# Altium PCB Signal_Integrity_2L.PcbDoc (part 2 of 2)
Units mm, origin at the board's own origin, x right, y up, seen from the top; angles counter-clockwise.
Board outline 110 x 260 mm, 2 copper layers (Top Layer 1, Bottom Layer 1), stack 1.6 mm thick; 48 components, 38 nets, 216 pads, 2708 vias.
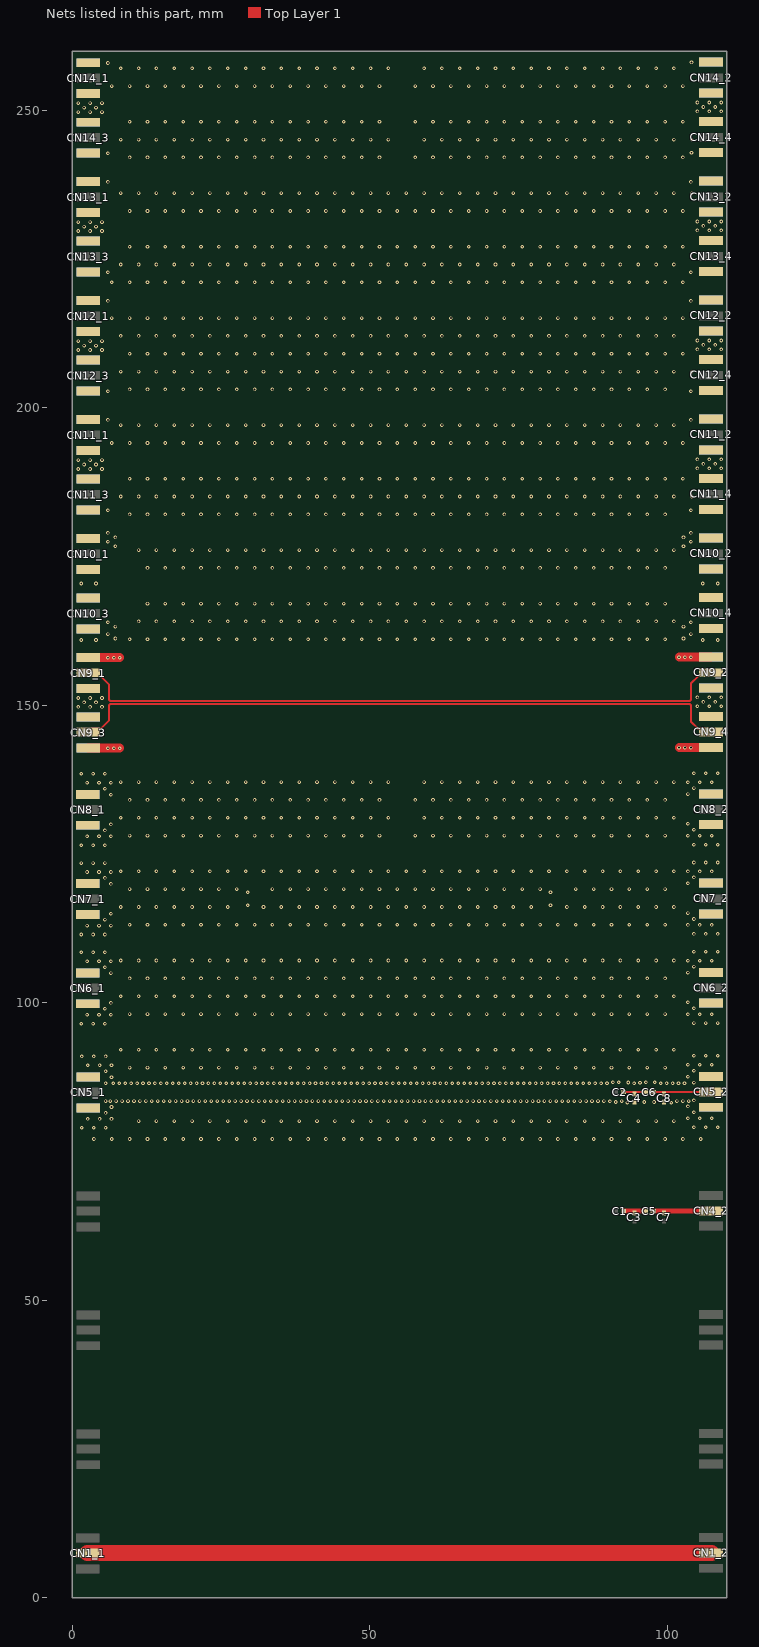
[diagram p2: the nets of this part, all layers, seen from the top]

## Via types
v1: diameter 0.6, hole 0.3, Top Layer 1 to Bottom Layer 1, tented both sides, 2700 vias
v2: diameter 0.7, hole 0.3, Top Layer 1 to Bottom Layer 1, tented both sides, 8 vias

## Nets (pads, with @x,y where several pads share a name; then routed paths per layer and width w, separated by ;. In a path a pad name is that pad's centre, name@x,y a point inside that pad or via, vN(x,y) a via of type N, cw(c..) or ccw(c..) an arc to the next point about the centre after c; other vN are vias at no path point) (continued)
GND5: C4.1 C8.1 CN5_1.2 CN5_2.2
  other v1: 3.65,77.121 6.65,77.121 9.65,77.121 12.65,77.121 15.65,77.121 18.65,77.121 21.65,77.121 24.65,77.121 27.65,77.121 30.65,77.121 33.65,77.121 36.65,77.121 39.65,77.121 42.65,77.121 45.65,77.121 48.65,77.121 51.65,77.121 54.65,77.121 57.65,77.121 60.65,77.121 63.65,77.121 66.65,77.121 69.65,77.121 72.65,77.121 75.65,77.121 78.65,77.121 81.65,77.121 84.65,77.121 87.65,77.121 90.65,77.121 93.65,77.121 96.65,77.121 99.65,77.121 102.65,77.121 105.65,77.121 1.6,79 3.6,79 5.6,79 104.5,79.1 106.5,79.1 108.5,79.1 11.15,80.121 14.15,80.121 17.15,80.121 20.15,80.121 23.15,80.121 26.15,80.121 29.15,80.121 32.15,80.121 35.15,80.121 38.15,80.121 41.15,80.121 44.15,80.121 47.15,80.121 50.15,80.121 53.15,80.121 56.15,80.121 59.15,80.121 62.15,80.121 65.15,80.121 68.15,80.121 71.15,80.121 74.15,80.121 77.15,80.121 80.15,80.121 83.15,80.121 86.15,80.121 89.15,80.121 92.15,80.121 95.15,80.121 98.15,80.121 101.15,80.121 2.6,80.5 4.6,80.5 6.6,80.5 103.5,80.6 105.5,80.6 107.5,80.6 5.6,81.5 104.5,81.6 6.6,82.5 103.5,82.6 100.686,83.226 93.289,83.245 91.37,83.339 96.16,83.339 97.804,83.339 90.376,83.45 92.359,83.484 5.6,83.5 6.377,83.495 7.377,83.495 8.377,83.495 9.377,83.495 10.377,83.495 11.377,83.495 12.377,83.495 13.377,83.495 14.377,83.495 15.377,83.495 16.377,83.495 17.377,83.495 18.377,83.495 19.377,83.495 20.377,83.495 21.377,83.495 22.377,83.495 23.377,83.495 24.377,83.495 25.377,83.495 26.377,83.495 27.377,83.495 28.377,83.495 29.377,83.495 30.377,83.495 31.377,83.495 32.377,83.495 33.377,83.495 34.377,83.495 35.377,83.495 36.377,83.495 37.377,83.495 38.377,83.495 39.377,83.495 40.377,83.495 41.377,83.495 42.377,83.495 43.377,83.495 44.377,83.495 45.377,83.495 46.377,83.495 47.377,83.495 48.377,83.495 49.377,83.495 50.377,83.495 51.377,83.495 52.377,83.495 53.377,83.495 54.377,83.495 55.377,83.495 56.377,83.495 57.377,83.495 58.377,83.495 59.377,83.495 60.377,83.495 61.377,83.495 62.377,83.495 63.377,83.495 64.377,83.495 65.377,83.495 66.377,83.495 67.377,83.495 68.377,83.495 69.377,83.495 70.377,83.495 71.377,83.495 72.377,83.495 73.377,83.495 74.377,83.495 75.377,83.495 76.377,83.495 77.377,83.495 78.377,83.495 79.377,83.495 80.377,83.495 81.377,83.495 82.377,83.495 83.377,83.495 84.377,83.495 85.377,83.495 86.377,83.495 87.377,83.495 88.377,83.495 89.377,83.495 101.649,83.495 102.649,83.495 103.649,83.495 104.5,83.6 5.6,86.5 6.899,86.505 7.899,86.505 8.899,86.505 9.899,86.505 10.899,86.505 11.899,86.505 12.899,86.505 13.899,86.505 14.899,86.505 15.899,86.505 16.899,86.505 17.899,86.505 18.899,86.505 19.899,86.505 20.899,86.505 21.899,86.505 22.899,86.505 23.899,86.505 24.899,86.505 25.899,86.505 26.899,86.505 27.899,86.505 28.899,86.505 29.899,86.505 30.899,86.505 31.899,86.505 32.899,86.505 33.899,86.505 34.899,86.505 35.899,86.505 36.899,86.505 37.899,86.505 38.899,86.505 39.899,86.505 40.899,86.505 41.899,86.505 42.899,86.505 43.899,86.505 44.899,86.505 45.899,86.505 46.899,86.505 47.899,86.505 48.899,86.505 49.898,86.505 50.898,86.505 51.898,86.505 52.898,86.505 53.898,86.505 54.898,86.505 55.898,86.505 56.898,86.505 57.898,86.505 58.898,86.505 59.898,86.505 60.898,86.505 61.898,86.505 62.898,86.505 63.898,86.505 64.898,86.505 65.898,86.505 66.898,86.505 67.898,86.505 68.898,86.505 69.898,86.505 70.898,86.505 71.898,86.505 72.898,86.505 73.898,86.505 74.898,86.505 75.898,86.505 76.898,86.505 77.898,86.505 78.898,86.505 79.898,86.505 80.898,86.505 81.898,86.505 82.898,86.505 83.898,86.505 84.898,86.505 85.898,86.505 86.898,86.505 87.898,86.505 88.898,86.505 89.898,86.505 94.447,86.505 98.918,86.505 99.918,86.505 100.918,86.505 101.918,86.505 102.918,86.505 95.445,86.578 104.5,86.6 93.454,86.618 90.886,86.661 91.886,86.647 96.441,86.661 97.93,86.661 6.6,87.5 103.5,87.6 5.6,88.5 104.5,88.6 9.65,89.121 12.65,89.121 15.65,89.121 18.65,89.121 21.65,89.121 24.65,89.121 27.65,89.121 30.65,89.121 33.65,89.121 36.65,89.121 39.65,89.121 42.65,89.121 45.65,89.121 48.65,89.121 51.65,89.121 54.65,89.121 57.65,89.121 60.65,89.121 63.65,89.121 66.65,89.121 69.65,89.121 72.65,89.121 75.65,89.121 78.65,89.121 81.65,89.121 84.65,89.121 87.65,89.121 90.65,89.121 93.65,89.121 96.65,89.121 99.65,89.121 2.6,89.5 4.6,89.5 6.6,89.5 103.5,89.6 105.5,89.6 107.5,89.6 1.6,91 3.6,91 5.6,91 104.5,91.1 106.5,91.1 108.5,91.1 8.15,92.121 11.15,92.121 14.15,92.121 17.15,92.121 20.15,92.121 23.15,92.121 26.15,92.121 29.15,92.121 32.15,92.121 35.15,92.121 38.15,92.121 41.15,92.121 44.15,92.121 47.15,92.121 50.15,92.121 53.15,92.121 56.15,92.121 59.15,92.121 62.15,92.121 65.15,92.121 68.15,92.121 71.15,92.121 74.15,92.121 77.15,92.121 80.15,92.121 83.15,92.121 86.15,92.121 89.15,92.121 92.15,92.121 95.15,92.121 98.15,92.121 101.15,92.121
GND6: CN6_1.2 CN6_2.2
  other v1: 1.5,96.5 3.5,96.5 5.5,96.5 104.5,96.6 106.5,96.6 108.5,96.6 2.5,98 4.5,98 6.5,98 9.65,98.121 12.65,98.121 15.65,98.121 18.65,98.121 21.65,98.121 24.65,98.121 27.65,98.121 30.65,98.121 33.65,98.121 36.65,98.121 39.65,98.121 42.65,98.121 45.65,98.121 48.65,98.121 51.65,98.121 54.65,98.121 57.65,98.121 60.65,98.121 63.65,98.121 66.65,98.121 69.65,98.121 72.65,98.121 75.65,98.121 78.65,98.121 81.65,98.121 84.65,98.121 87.65,98.121 90.65,98.121 93.65,98.121 96.65,98.121 99.65,98.121 103.5,98.1 105.5,98.1 107.5,98.1 5.5,99 104.5,99.1 6.5,100 103.5,100.1 8.15,101.121 11.15,101.121 14.15,101.121 17.15,101.121 20.15,101.121 23.15,101.121 26.15,101.121 29.15,101.121 32.15,101.121 35.15,101.121 38.15,101.121 41.15,101.121 44.15,101.121 47.15,101.121 50.15,101.121 53.15,101.121 56.15,101.121 59.15,101.121 62.15,101.121 65.15,101.121 68.15,101.121 71.15,101.121 74.15,101.121 77.15,101.121 80.15,101.121 83.15,101.121 86.15,101.121 89.15,101.121 92.15,101.121 95.15,101.121 98.15,101.121 101.15,101.121 9.65,104.121 12.65,104.121 15.65,104.121 18.65,104.121 21.65,104.121 24.65,104.121 27.65,104.121 30.65,104.121 33.65,104.121 36.65,104.121 39.65,104.121 42.65,104.121 45.65,104.121 48.65,104.121 51.65,104.121 54.65,104.121 57.65,104.121 60.65,104.121 63.65,104.121 66.65,104.121 69.65,104.121 72.65,104.121 75.65,104.121 78.65,104.121 81.65,104.121 84.65,104.121 87.65,104.121 90.65,104.121 93.65,104.121 96.65,104.121 99.65,104.121 6.5,105 103.5,105.1 5.5,106 104.5,106.1 2.5,107 4.5,107 6.5,107 103.5,107.1 105.5,107.1 107.5,107.1 8.15,107.121 11.15,107.121 14.15,107.121 17.15,107.121 20.15,107.121 23.15,107.121 26.15,107.121 29.15,107.121 32.15,107.121 35.15,107.121 38.15,107.121 41.15,107.121 44.15,107.121 47.15,107.121 50.15,107.121 53.15,107.121 56.15,107.121 59.15,107.121 62.15,107.121 65.15,107.121 68.15,107.121 71.15,107.121 74.15,107.121 77.15,107.121 80.15,107.121 83.15,107.121 86.15,107.121 89.15,107.121 92.15,107.121 95.15,107.121 98.15,107.121 101.15,107.121 1.5,108.5 3.5,108.5 5.5,108.5 104.5,108.6 106.5,108.6 108.5,108.6
GND7: CN7_1.2 CN7_2.2
  other v1: 1.5,111.5 3.5,111.5 5.5,111.5 104.5,111.6 106.5,111.6 108.5,111.6 2.5,113 4.5,113 6.5,113 103.5,113.1 105.5,113.1 107.5,113.1 9.65,113.121 12.65,113.121 15.65,113.121 18.65,113.121 21.65,113.121 24.65,113.121 27.65,113.121 30.65,113.121 33.65,113.121 36.65,113.121 39.65,113.121 42.65,113.121 45.65,113.121 48.65,113.121 51.65,113.121 54.65,113.121 57.65,113.121 60.65,113.121 63.65,113.121 66.65,113.121 69.65,113.121 72.65,113.121 75.65,113.121 78.65,113.121 81.65,113.121 84.65,113.121 87.65,113.121 90.65,113.121 93.65,113.121 96.65,113.121 99.65,113.121 5.5,114 104.5,114.1 6.5,115 103.5,115.1 8.15,116.121 11.15,116.121 14.15,116.121 17.15,116.121 20.15,116.121 23.15,116.121 26.15,116.121 32.15,116.121 35.15,116.121 38.15,116.121 41.15,116.121 44.15,116.121 47.15,116.121 50.15,116.121 53.15,116.121 56.15,116.121 59.15,116.121 62.15,116.121 65.15,116.121 68.15,116.121 71.15,116.121 74.15,116.121 77.15,116.121 83.15,116.121 86.15,116.121 89.15,116.121 92.15,116.121 95.15,116.121 98.15,116.121 101.15,116.121 29.5,116.4 80.4,116.4 29.5,118.6 80.4,118.6 9.65,119.121 12.65,119.121 15.65,119.121 18.65,119.121 21.65,119.121 24.65,119.121 27.65,119.121 33.65,119.121 36.65,119.121 39.65,119.121 42.65,119.121 45.65,119.121 48.65,119.121 51.65,119.121 54.65,119.121 57.65,119.121 60.65,119.121 63.65,119.121 66.65,119.121 69.65,119.121 72.65,119.121 75.65,119.121 78.65,119.121 84.65,119.121 87.65,119.121 90.65,119.121 93.65,119.121 96.65,119.121 99.65,119.121 6.5,120 103.5,120.1 5.5,121 104.5,121.1 2.5,122 4.5,122 6.5,122 103.5,122.1 105.5,122.1 107.5,122.1 8.15,122.121 11.15,122.121 14.15,122.121 17.15,122.121 20.15,122.121 23.15,122.121 26.15,122.121 29.15,122.121 32.15,122.121 35.15,122.121 38.15,122.121 41.15,122.121 44.15,122.121 47.15,122.121 50.15,122.121 53.15,122.121 56.15,122.121 59.15,122.121 62.15,122.121 65.15,122.121 68.15,122.121 71.15,122.121 74.15,122.121 77.15,122.121 80.15,122.121 83.15,122.121 86.15,122.121 89.15,122.121 92.15,122.121 95.15,122.121 98.15,122.121 101.15,122.121 1.5,123.5 3.5,123.5 5.5,123.5 104.5,123.6 106.5,123.6 108.5,123.6
GND8: CN8_1.2 CN8_2.2
  other v1: 1.5,126.5 3.5,126.5 5.5,126.5 104.5,126.6 106.5,126.6 108.5,126.6 2.5,128 4.5,128 6.5,128 103.5,128.1 105.5,128.1 107.5,128.1 9.65,128.121 12.65,128.121 15.65,128.121 18.65,128.121 21.65,128.121 24.65,128.121 27.65,128.121 30.65,128.121 33.65,128.121 36.65,128.121 39.65,128.121 42.65,128.121 45.65,128.121 48.65,128.121 51.65,128.121 57.65,128.121 60.65,128.121 63.65,128.121 66.65,128.121 69.65,128.121 72.65,128.121 75.65,128.121 78.65,128.121 81.65,128.121 84.65,128.121 87.65,128.121 90.65,128.121 93.65,128.121 96.65,128.121 99.65,128.121 5.5,129 104.5,129.1 6.5,130 103.5,130.1 8.15,131.121 11.15,131.121 14.15,131.121 17.15,131.121 20.15,131.121 23.15,131.121 26.15,131.121 29.15,131.121 32.15,131.121 35.15,131.121 38.15,131.121 41.15,131.121 44.15,131.121 47.15,131.121 50.15,131.121 53.15,131.121 59.15,131.121 62.15,131.121 65.15,131.121 68.15,131.121 71.15,131.121 74.15,131.121 77.15,131.121 80.15,131.121 83.15,131.121 86.15,131.121 89.15,131.121 92.15,131.121 95.15,131.121 98.15,131.121 101.15,131.121 9.65,134.121 12.65,134.121 15.65,134.121 18.65,134.121 21.65,134.121 24.65,134.121 27.65,134.121 30.65,134.121 33.65,134.121 36.65,134.121 39.65,134.121 42.65,134.121 45.65,134.121 48.65,134.121 51.65,134.121 57.65,134.121 60.65,134.121 63.65,134.121 66.65,134.121 69.65,134.121 72.65,134.121 75.65,134.121 78.65,134.121 81.65,134.121 84.65,134.121 87.65,134.121 90.65,134.121 93.65,134.121 96.65,134.121 99.65,134.121 6.5,135 103.5,135.1 5.5,136 104.5,136.1 2.5,137 4.5,137 6.5,137 103.5,137.1 105.5,137.1 107.5,137.1 8.15,137.121 11.15,137.121 14.15,137.121 17.15,137.121 20.15,137.121 23.15,137.121 26.15,137.121 29.15,137.121 32.15,137.121 35.15,137.121 38.15,137.121 41.15,137.121 44.15,137.121 47.15,137.121 50.15,137.121 53.15,137.121 59.15,137.121 62.15,137.121 65.15,137.121 68.15,137.121 71.15,137.121 74.15,137.121 77.15,137.121 80.15,137.121 83.15,137.121 86.15,137.121 89.15,137.121 92.15,137.121 95.15,137.121 98.15,137.121 101.15,137.121 1.5,138.5 3.5,138.5 5.5,138.5 104.5,138.6 106.5,138.6 108.5,138.6
GND9: CN9_1.2 CN9_2.2 CN9_3.2 CN9_4.2 | length 21
  Top Layer 1 w1.5: CN9_3.2@2.7,142.86 v1@7.96,142.86 ; CN9_1.2@2.7,158.04 v1@7.96,158.04 ; v1@102.04,142.96 CN9_4.2@107.3,142.96 ; v1@102.04,158.14 CN9_2.2@107.3,158.14
  other v1: 6,142.82 7,142.82 8,142.82 102,142.92 103,142.92 104,142.92 1,149.75 3,149.75 5,149.75 105.1,149.85 107.1,149.85 109.1,149.85 2,150.5 4,150.5 106.1,150.6 108.1,150.6 1,151.25 3,151.25 5,151.25 105.1,151.35 107.1,151.35 109.1,151.35 6,158 7,158 8,158 102,158.1 103,158.1 104,158.1
GND10: CN10_1.2 CN10_2.2 CN10_3.2 CN10_4.2
  other v1: 1.5,161 4,161 106,161 108.5,161 9.65,161.121 12.65,161.121 15.65,161.121 18.65,161.121 21.65,161.121 24.65,161.121 27.65,161.121 30.65,161.121 33.65,161.121 36.65,161.121 39.65,161.121 42.65,161.121 45.65,161.121 48.65,161.121 51.65,161.121 54.65,161.121 57.65,161.121 60.65,161.121 63.65,161.121 66.65,161.121 69.65,161.121 72.65,161.121 75.65,161.121 78.65,161.121 81.65,161.121 84.65,161.121 87.65,161.121 90.65,161.121 93.65,161.121 96.65,161.121 99.65,161.121 7.25,161.25 102.75,161.25 6,162 104,162 7.25,163.25 102.75,163.25 6,164 104,164 11.15,164.121 14.15,164.121 17.15,164.121 20.15,164.121 23.15,164.121 26.15,164.121 29.15,164.121 32.15,164.121 35.15,164.121 38.15,164.121 41.15,164.121 44.15,164.121 47.15,164.121 50.15,164.121 53.15,164.121 56.15,164.121 59.15,164.121 62.15,164.121 65.15,164.121 68.15,164.121 71.15,164.121 74.15,164.121 77.15,164.121 80.15,164.121 83.15,164.121 86.15,164.121 89.15,164.121 92.15,164.121 95.15,164.121 98.15,164.121 101.15,164.121 12.65,167.121 15.65,167.121 18.65,167.121 21.65,167.121 24.65,167.121 27.65,167.121 30.65,167.121 33.65,167.121 36.65,167.121 39.65,167.121 42.65,167.121 45.65,167.121 48.65,167.121 51.65,167.121 54.65,167.121 57.65,167.121 60.65,167.121 63.65,167.121 66.65,167.121 69.65,167.121 72.65,167.121 75.65,167.121 78.65,167.121 81.65,167.121 84.65,167.121 87.65,167.121 90.65,167.121 93.65,167.121 96.65,167.121 99.65,167.121 1.5,170.5 4,170.5 106,170.5 108.5,170.5 12.65,173.121 15.65,173.121 18.65,173.121 21.65,173.121 24.65,173.121 27.65,173.121 30.65,173.121 33.65,173.121 36.65,173.121 39.65,173.121 42.65,173.121 45.65,173.121 48.65,173.121 51.65,173.121 54.65,173.121 57.65,173.121 60.65,173.121 63.65,173.121 66.65,173.121 69.65,173.121 72.65,173.121 75.65,173.121 78.65,173.121 81.65,173.121 84.65,173.121 87.65,173.121 90.65,173.121 93.65,173.121 96.65,173.121 99.65,173.121 11.15,176.121 14.15,176.121 17.15,176.121 20.15,176.121 23.15,176.121 26.15,176.121 29.15,176.121 32.15,176.121 35.15,176.121 38.15,176.121 41.15,176.121 44.15,176.121 47.15,176.121 50.15,176.121 53.15,176.121 56.15,176.121 59.15,176.121 62.15,176.121 65.15,176.121 68.15,176.121 71.15,176.121 74.15,176.121 77.15,176.121 80.15,176.121 83.15,176.121 86.15,176.121 89.15,176.121 92.15,176.121 95.15,176.121 98.15,176.121 101.15,176.121 7.25,176.75 102.75,176.75 6,177.5 104,177.5 7.25,178.25 102.75,178.25 6,179 104,179
GND11: CN11_1.2 CN11_2.2 CN11_3.2 CN11_4.2
  other v1: 9.65,182.121 12.65,182.121 15.65,182.121 18.65,182.121 21.65,182.121 24.65,182.121 27.65,182.121 30.65,182.121 33.65,182.121 36.65,182.121 39.65,182.121 42.65,182.121 45.65,182.121 48.65,182.121 51.65,182.121 54.65,182.121 57.65,182.121 60.65,182.121 63.65,182.121 66.65,182.121 69.65,182.121 72.65,182.121 75.65,182.121 78.65,182.121 81.65,182.121 84.65,182.121 87.65,182.121 90.65,182.121 93.65,182.121 96.65,182.121 99.65,182.121 6,182.82 104,182.82 8.15,185.121 11.15,185.121 14.15,185.121 17.15,185.121 20.15,185.121 23.15,185.121 26.15,185.121 29.15,185.121 32.15,185.121 35.15,185.121 38.15,185.121 41.15,185.121 44.15,185.121 47.15,185.121 50.15,185.121 53.15,185.121 56.15,185.121 59.15,185.121 62.15,185.121 65.15,185.121 68.15,185.121 71.15,185.121 74.15,185.121 77.15,185.121 80.15,185.121 83.15,185.121 86.15,185.121 89.15,185.121 92.15,185.121 95.15,185.121 98.15,185.121 101.15,185.121 104.15,185.121 9.65,188.121 12.65,188.121 15.65,188.121 18.65,188.121 21.65,188.121 24.65,188.121 27.65,188.121 30.65,188.121 33.65,188.121 36.65,188.121 39.65,188.121 42.65,188.121 45.65,188.121 48.65,188.121 51.65,188.121 54.65,188.121 57.65,188.121 60.65,188.121 63.65,188.121 66.65,188.121 69.65,188.121 72.65,188.121 75.65,188.121 78.65,188.121 81.65,188.121 84.65,188.121 87.65,188.121 90.65,188.121 93.65,188.121 96.65,188.121 99.65,188.121 102.65,188.121 1,189.75 3,189.75 5,189.75 105.1,189.85 107.1,189.85 109.1,189.85 2,190.5 4,190.5 106.1,190.6 108.1,190.6 1,191.25 3,191.25 5,191.25 105.1,191.35 107.1,191.35 109.1,191.35 6.65,194.121 9.65,194.121 12.65,194.121 15.65,194.121 18.65,194.121 21.65,194.121 24.65,194.121 27.65,194.121 30.65,194.121 33.65,194.121 36.65,194.121 39.65,194.121 42.65,194.121 45.65,194.121 48.65,194.121 51.65,194.121 54.65,194.121 57.65,194.121 60.65,194.121 63.65,194.121 66.65,194.121 69.65,194.121 72.65,194.121 75.65,194.121 78.65,194.121 81.65,194.121 84.65,194.121 87.65,194.121 90.65,194.121 93.65,194.121 96.65,194.121 99.65,194.121 102.65,194.121 8.15,197.121 11.15,197.121 14.15,197.121 17.15,197.121 20.15,197.121 23.15,197.121 26.15,197.121 29.15,197.121 32.15,197.121 35.15,197.121 38.15,197.121 41.15,197.121 44.15,197.121 47.15,197.121 50.15,197.121 53.15,197.121 56.15,197.121 59.15,197.121 62.15,197.121 65.15,197.121 68.15,197.121 71.15,197.121 74.15,197.121 77.15,197.121 80.15,197.121 83.15,197.121 86.15,197.121 89.15,197.121 92.15,197.121 95.15,197.121 98.15,197.121 101.15,197.121 6,198 104,198
GND12: CN12_1.2 CN12_2.2 CN12_3.2 CN12_4.2
  other v1: 6,202.82 104,202.82 9.65,203.121 12.65,203.121 15.65,203.121 18.65,203.121 21.65,203.121 24.65,203.121 27.65,203.121 30.65,203.121 33.65,203.121 36.65,203.121 39.65,203.121 42.65,203.121 45.65,203.121 48.65,203.121 51.65,203.121 54.65,203.121 57.65,203.121 60.65,203.121 63.65,203.121 66.65,203.121 69.65,203.121 72.65,203.121 75.65,203.121 78.65,203.121 81.65,203.121 84.65,203.121 87.65,203.121 90.65,203.121 93.65,203.121 96.65,203.121 99.65,203.121 8.15,206.121 11.15,206.121 14.15,206.121 17.15,206.121 20.15,206.121 23.15,206.121 26.15,206.121 29.15,206.121 32.15,206.121 35.15,206.121 38.15,206.121 41.15,206.121 44.15,206.121 47.15,206.121 50.15,206.121 53.15,206.121 56.15,206.121 59.15,206.121 62.15,206.121 65.15,206.121 68.15,206.121 71.15,206.121 74.15,206.121 77.15,206.121 80.15,206.121 83.15,206.121 86.15,206.121 89.15,206.121 92.15,206.121 95.15,206.121 98.15,206.121 101.15,206.121 104.15,206.121 9.65,209.121 12.65,209.121 15.65,209.121 18.65,209.121 21.65,209.121 24.65,209.121 27.65,209.121 30.65,209.121 33.65,209.121 36.65,209.121 39.65,209.121 42.65,209.121 45.65,209.121 48.65,209.121 51.65,209.121 54.65,209.121 57.65,209.121 60.65,209.121 63.65,209.121 66.65,209.121 69.65,209.121 72.65,209.121 75.65,209.121 78.65,209.121 81.65,209.121 84.65,209.121 87.65,209.121 90.65,209.121 93.65,209.121 96.65,209.121 99.65,209.121 102.65,209.121 1,209.75 3,209.75 5,209.75 105.1,209.85 107.1,209.85 109.1,209.85 2,210.5 4,210.5 106.1,210.6 108.1,210.6 1,211.25 3,211.25 5,211.25 105.1,211.35 107.1,211.35 109.1,211.35 8.15,212.121 11.15,212.121 14.15,212.121 17.15,212.121 20.15,212.121 23.15,212.121 26.15,212.121 29.15,212.121 32.15,212.121 35.15,212.121 38.15,212.121 41.15,212.121 44.15,212.121 47.15,212.121 50.15,212.121 53.15,212.121 56.15,212.121 59.15,212.121 62.15,212.121 65.15,212.121 68.15,212.121 71.15,212.121 74.15,212.121 77.15,212.121 80.15,212.121 83.15,212.121 86.15,212.121 89.15,212.121 92.15,212.121 95.15,212.121 98.15,212.121 101.15,212.121 6.65,215.121 9.65,215.121 12.65,215.121 15.65,215.121 18.65,215.121 21.65,215.121 24.65,215.121 27.65,215.121 30.65,215.121 33.65,215.121 36.65,215.121 39.65,215.121 42.65,215.121 45.65,215.121 48.65,215.121 51.65,215.121 54.65,215.121 57.65,215.121 60.65,215.121 63.65,215.121 66.65,215.121 69.65,215.121 72.65,215.121 75.65,215.121 78.65,215.121 81.65,215.121 84.65,215.121 87.65,215.121 90.65,215.121 93.65,215.121 96.65,215.121 99.65,215.121 102.65,215.121 6,218 104,218
GND13: CN13_1.2 CN13_2.2 CN13_3.2 CN13_4.2
  other v1: 6.65,221.121 9.65,221.121 12.65,221.121 15.65,221.121 18.65,221.121 21.65,221.121 24.65,221.121 27.65,221.121 30.65,221.121 33.65,221.121 36.65,221.121 39.65,221.121 42.65,221.121 45.65,221.121 48.65,221.121 51.65,221.121 54.65,221.121 57.65,221.121 60.65,221.121 63.65,221.121 66.65,221.121 69.65,221.121 72.65,221.121 75.65,221.121 78.65,221.121 81.65,221.121 84.65,221.121 87.65,221.121 90.65,221.121 93.65,221.121 96.65,221.121 99.65,221.121 102.65,221.121 6,222.82 104,222.82 8.15,224.121 11.15,224.121 14.15,224.121 17.15,224.121 20.15,224.121 23.15,224.121 26.15,224.121 29.15,224.121 32.15,224.121 35.15,224.121 38.15,224.121 41.15,224.121 44.15,224.121 47.15,224.121 50.15,224.121 53.15,224.121 56.15,224.121 59.15,224.121 62.15,224.121 65.15,224.121 68.15,224.121 71.15,224.121 74.15,224.121 77.15,224.121 80.15,224.121 83.15,224.121 86.15,224.121 89.15,224.121 92.15,224.121 95.15,224.121 98.15,224.121 101.15,224.121 9.65,227.121 12.65,227.121 15.65,227.121 18.65,227.121 21.65,227.121 24.65,227.121 27.65,227.121 30.65,227.121 33.65,227.121 36.65,227.121 39.65,227.121 42.65,227.121 45.65,227.121 48.65,227.121 51.65,227.121 54.65,227.121 57.65,227.121 60.65,227.121 63.65,227.121 66.65,227.121 69.65,227.121 72.65,227.121 75.65,227.121 78.65,227.121 81.65,227.121 84.65,227.121 87.65,227.121 90.65,227.121 93.65,227.121 96.65,227.121 99.65,227.121 102.65,227.121 1,229.75 3,229.75 5,229.75 105.1,229.85 107.1,229.85 109.1,229.85 2,230.5 4,230.5 106.1,230.6 108.1,230.6 1,231.25 3,231.25 5,231.25 105.1,231.35 107.1,231.35 109.1,231.35 9.65,233.121 12.65,233.121 15.65,233.121 18.65,233.121 21.65,233.121 24.65,233.121 27.65,233.121 30.65,233.121 33.65,233.121 36.65,233.121 39.65,233.121 42.65,233.121 45.65,233.121 48.65,233.121 51.65,233.121 54.65,233.121 57.65,233.121 60.65,233.121 63.65,233.121 66.65,233.121 69.65,233.121 72.65,233.121 75.65,233.121 78.65,233.121 81.65,233.121 84.65,233.121 87.65,233.121 90.65,233.121 93.65,233.121 96.65,233.121 99.65,233.121 102.65,233.121 8.15,236.121 11.15,236.121 14.15,236.121 17.15,236.121 20.15,236.121 23.15,236.121 26.15,236.121 29.15,236.121 32.15,236.121 35.15,236.121 38.15,236.121 41.15,236.121 44.15,236.121 47.15,236.121 50.15,236.121 53.15,236.121 56.15,236.121 59.15,236.121 62.15,236.121 65.15,236.121 68.15,236.121 71.15,236.121 74.15,236.121 77.15,236.121 80.15,236.121 83.15,236.121 86.15,236.121 89.15,236.121 92.15,236.121 95.15,236.121 98.15,236.121 101.15,236.121 104.15,236.121 6,238 104,238
GND14: CN14_1.2 CN14_2.2 CN14_3.2 CN14_4.2
  other v1: 9.65,242.121 12.65,242.121 15.65,242.121 18.65,242.121 21.65,242.121 24.65,242.121 27.65,242.121 30.65,242.121 33.65,242.121 36.65,242.121 39.65,242.121 42.65,242.121 45.65,242.121 48.65,242.121 51.65,242.121 57.65,242.121 60.65,242.121 63.65,242.121 66.65,242.121 69.65,242.121 72.65,242.121 75.65,242.121 78.65,242.121 81.65,242.121 84.65,242.121 87.65,242.121 90.65,242.121 93.65,242.121 96.65,242.121 99.65,242.121 102.65,242.121 6,242.82 104.1,242.92 8.15,245.121 11.15,245.121 14.15,245.121 17.15,245.121 20.15,245.121 23.15,245.121 26.15,245.121 29.15,245.121 32.15,245.121 35.15,245.121 38.15,245.121 41.15,245.121 44.15,245.121 47.15,245.121 50.15,245.121 53.15,245.121 59.15,245.121 62.15,245.121 65.15,245.121 68.15,245.121 71.15,245.121 74.15,245.121 77.15,245.121 80.15,245.121 83.15,245.121 86.15,245.121 89.15,245.121 92.15,245.121 95.15,245.121 98.15,245.121 101.15,245.121 104.15,245.121 9.65,248.121 12.65,248.121 15.65,248.121 18.65,248.121 21.65,248.121 24.65,248.121 27.65,248.121 30.65,248.121 33.65,248.121 36.65,248.121 39.65,248.121 42.65,248.121 45.65,248.121 48.65,248.121 51.65,248.121 57.65,248.121 60.65,248.121 63.65,248.121 66.65,248.121 69.65,248.121 72.65,248.121 75.65,248.121 78.65,248.121 81.65,248.121 84.65,248.121 87.65,248.121 90.65,248.121 93.65,248.121 96.65,248.121 99.65,248.121 102.65,248.121 1,249.75 3,249.75 5,249.75 105.1,249.85 107.1,249.85 109.1,249.85 2,250.5 4,250.5 106.1,250.6 108.1,250.6 1,251.25 3,251.25 5,251.25 105.1,251.35 107.1,251.35 109.1,251.35 6.65,254.121 9.65,254.121 12.65,254.121 15.65,254.121 18.65,254.121 21.65,254.121 24.65,254.121 27.65,254.121 30.65,254.121 33.65,254.121 36.65,254.121 39.65,254.121 42.65,254.121 45.65,254.121 48.65,254.121 51.65,254.121 57.65,254.121 60.65,254.121 63.65,254.121 66.65,254.121 69.65,254.121 72.65,254.121 75.65,254.121 78.65,254.121 81.65,254.121 84.65,254.121 87.65,254.121 90.65,254.121 93.65,254.121 96.65,254.121 99.65,254.121 102.65,254.121 8.15,257.121 11.15,257.121 14.15,257.121 17.15,257.121 20.15,257.121 23.15,257.121 26.15,257.121 29.15,257.121 32.15,257.121 35.15,257.121 38.15,257.121 41.15,257.121 44.15,257.121 47.15,257.121 50.15,257.121 53.15,257.121 59.15,257.121 62.15,257.121 65.15,257.121 68.15,257.121 71.15,257.121 74.15,257.121 77.15,257.121 80.15,257.121 83.15,257.121 86.15,257.121 89.15,257.121 92.15,257.121 95.15,257.121 98.15,257.121 101.15,257.121 6,258 104.1,258.1
MICROSTRIP_50OHMS: CN1_1.1 CN1_2.1 | length 104.9
  Top Layer 1 w2.7: CN1_1.1@2.55,7.5 CN1_1.1@2.6,7.5 CN1_2.1@107.4,7.5 CN1_2.1@107.45,7.5
MICROSTRIP_90OHMS_N: CN9_3.1 CN9_4.1 | length 111.7
  Top Layer 1 w0.36: CN9_3.1@2.7,145.5 3.27,146.07 4.77,146.07 6.2,147.5 6.2,150.044 6.411,150.255 103.789,150.255 104,150.044 104,147.3 105.23,146.07 106.83,146.07 CN9_4.1@107.4,145.5
MICROSTRIP_90OHMS_P: CN9_1.1 CN9_2.1 | length 111.7
  Top Layer 1 w0.36: CN9_1.1@2.7,155.5 3.27,154.93 4.77,154.93 6.2,153.5 6.2,150.956 6.411,150.745 103.791,150.745 104.002,150.956 104.002,153.702 105.23,154.93 106.83,154.93 CN9_2.1@107.4,155.5
NetC1_2: C1.2 C3.2 C5.1 | length 3.7
  Top Layer 1 w0.8: C1.2@92.673,65 C5.1@96.327,65
NetC2_2: C2.2 C4.2 C6.1 | length 3.7
  Top Layer 1 w0.38: C2.2@92.673,85 C6.1@96.327,85
NetC5_2: C5.2 C7.2 CN4_2.1 | length 9.7
  Top Layer 1 w0.8: C5.2@97.673,65 CN4_2.1@107.4,65
NetC6_2: C6.2 C8.2 CN5_2.1 | length 9.7
  Top Layer 1 w0.38: C6.2@97.673,85 CN5_2.1@107.4,85

## Polygon pours and split planes (outlines as drawn)
GND8 on Bottom Layer 1 "GND8_L02_P077" (solid, remove dead copper, pour order 77): 0,140 0,125 110,125 110,140
GND12 on Bottom Layer 1 "GND12_L02_P031" (solid, remove dead copper, pour order 31): 0,220 0,200 110,200 110,220
GND11 on Bottom Layer 1 "GND11_L02_P030" (solid, remove dead copper, pour order 30): 0,200 0,180 110,180 110,200
GND6 on Bottom Layer 1 "GND6_L02_P025" (solid, remove dead copper, pour order 25): 0,110 0,95 110,95 110,110
GND7 on Bottom Layer 1 "GND7_L02_P026" (solid, remove dead copper, pour order 26): 0,125 0,110 110,110 110,125
GND5 on Bottom Layer 1 "GND5_L02_P024" (solid, remove dead copper, pour order 24): 0,95 0,75 110,75 110,95
GND14 on Bottom Layer 1 "GND14_L02_P065" (solid, remove dead copper, pour order 65): 0,260 0,240 110,240 110,260
GND2 on Bottom Layer 1 "GND2_L02_P021" (solid, remove dead copper, pour order 21): 0,35 0,15 110,15 110,35
GND13 on Bottom Layer 1 "GND13_L02_P032" (solid, remove dead copper, pour order 32): 0,240 0,220 110,220 110,240
GND10 on Bottom Layer 1 "GND10_L02_P029" (solid, remove dead copper, pour order 29): 0,180 0,160 110,160 110,180
GND9 on Bottom Layer 1 "GND9_L02_P028" (solid, remove dead copper, pour order 28): 0,160 0,140 110,140 110,160
GND4 on Bottom Layer 1 "GND4_L02_P023" (solid, remove dead copper, pour order 23): 0,75 0,55 110,55 110,75
GND3 on Bottom Layer 1 "GND3_L02_P022" (solid, remove dead copper, pour order 22): 0,55 0,35 110,35 110,55
GND1 on Bottom Layer 1 "GND1_L02_P019" (solid, remove dead copper, pour order 19): 0,15 0,0 110,0 110,15
GND11 on Top Layer 1 "GND11_L01_P072" (solid, remove dead copper, pour order 72): 0,200 0,180 110,180 110,200
GND10 on Top Layer 1 "GND10_L01_P036" (solid, remove dead copper, pour order 36): 0,180 0,160 110,160 110,180
GND9 on Top Layer 1 "GND9_L01_P057" (solid, remove dead copper, pour order 57): 110.1,153.6 105.1,153.6 104.6,153.1 104.6,148.1 105.1,147.6 110.1,147.6
GND6 on Top Layer 1 "GND6_L01_P079" (solid, remove dead copper, pour order 79): 0,110 0,95 110,95 110,110
GND7 on Top Layer 1 "GND7_L01_P078" (solid, remove dead copper, pour order 78): 0,125 0,110 110,110 110,125
GND8 on Top Layer 1 "GND8_L01_P027" (solid, remove dead copper, pour order 27): 0,140 0,125 110,125 110,140
GND14 on Top Layer 1 "GND14_L01_P076" (solid, remove dead copper, pour order 76): 0,260 0,240 110,240 110,260
GND13 on Top Layer 1 "GND13_L01_P074" (solid, remove dead copper, pour order 74): 0,240 0,220 110,220 110,240
GND12 on Top Layer 1 "GND12_L01_P073" (solid, remove dead copper, pour order 73): 0,220 0,200 110,200 110,220
GND5 on Top Layer 1 "GND5_L01_P035" (solid, remove dead copper, pour order 35): 0,95 0,75 110,75 110,95
GND4 on Top Layer 1 "GND4_L01_P034" (solid, remove dead copper, pour order 34): 0,75 0,55 110,55 110,75
GND3 on Top Layer 1 "GND3_L01_P033" (solid, remove dead copper, pour order 33): 0,55 0,35 110,35 110,55
GND2 on Top Layer 1 "GND2_L01_P020" (solid, remove dead copper, pour order 20): 0,35 0,15 110,15 110,35
GND9 on Top Layer 1 "GND9_L01_P056" (solid, remove dead copper, pour order 56): 0,153.5 5,153.5 5.5,153 5.5,148 5,147.5 0,147.5
GND1 on Top Layer 1 "GND1_L01_P043" (solid, remove dead copper, pour order 43): 110,0 103,0 103,5.5 110,5.5
GND1 on Top Layer 1 "GND1_L01_P042" (solid, remove dead copper, pour order 42): 110,15 103,15 103,9.5 110,9.5
GND1 on Top Layer 1 "GND1_L01_P041" (solid, remove dead copper, pour order 41): 0,0 7,0 7,5.5 0,5.5
GND1 on Top Layer 1 "GND1_L01_P040" (solid, remove dead copper, pour order 40): 0,15 7,15 7,9.5 0,9.5

## Keep-outs
Keep-Out Layer:
  lines w0.2: 0,15 110,15 ; 0,35 110,35 ; 0,55 110,55 ; 0,75 110,75 ; 0,95 110,95 ; 0,110 110,110 ; 0,125 110,125 ; 0,140 110,140 ; 0,160 110,160 ; 0,180 110,180 ; 0,200 110,200 ; 0,220 110,220 ; 0,240 110,240 ; 0,0 0,260 110,260 110,0 0,0

## Other copper
Bottom Layer 1:
  pour cut-out: 54,258 54,242 55.9,242 55.9,258
  pour cut-out: 54,138 54,127 55.9,127 55.9,138

## Silkscreen, mask and mechanical layers (free items; w line width, h text height)
Top Overlay:
  text "14 - CPW DP 90Ω + GND DESC. 2L [W190 G130 GG127]" at 0,256.5 h2.5
  text "13 - CPW DP 90Ω + SKEW 2L [W190 G130 GG127]" at 0,236.5 h2.5
  text "12 - CPW DP 90Ω + VIAS + RETURN PATH 2L [W190 G130 GG127]" at 0,216.5 h2.5
  text "11 - CPW DP 90Ω + VIAS 2L [W190 G130 GG127]" at 0,196.5 h2.5
  text "10 - CPW DP 90Ω 2L [W190 G130 GG127] BASELINE" at 0,176.5 h2.5
  text "9 - MICROSTRIP DP 90Ω 2L [W360 G130]" at 0,156.5 h2.5
  text "8 - CPW 50Ω GND DESC. 2L [W800]" at 0,136.5 h2.5
  text "7 - CPW 50Ω + VIAS + RETURN PATH 2L  [W800]" at 0,121.5 h2.5
  text "6 - CPW 50Ω + VIAS 2L  [W800]" at 0,106.5 h2.5
  text "5 - CPW 50Ω + MATCHING 2L [W380 G120]" at 0,91.5 h2.5
  text "4 - CPW 50Ω + MATCHING 2L [W800 G200]" at 0,71.5 h2.5
  text "3 - CPW 50Ω 2L [W380 G120]" at 0,51.5 h2.5
  text "2 - CPW 50Ω 2L [W800 G200] BASELINE" at 0,31.5 h2.5
  text "1 - MICROSTRIP 50Ω 2L [W2700]" at 0,11.5 h2.5
Referencias:
  circle w0.254: c78.5,65.5 r3
  circle w0.254: c9.5,65.5 r5
  circle w0.254: c78.5,9.5 r5
  circle w0.254: c9.5,9.5 r5
  circle w0.254: c78.5,65.5 r5
  circle w0.254: c9.5,65.5 r3
  circle w0.254: c9.5,9.5 r3
  circle w0.254: c78.5,9.5 r3
  lines w0.1: 83.3,7 83.3,68.091 ; 3,16 ccw(c15.988,15.988) 15.976,3 74.024,3 ccw(c74.012,15.988) 87,16 87,59 ccw(c74.012,59.012) 74.024,72 15.976,72 ccw(c15.988,59.012) 3,59 3,16

## Dimensions
0,260 to 0,0 on Dimensions
0,0 to 110,0 on Dimensions